# Altium PCB WGPIB.PcbDoc
Units mm, origin at the board's own origin, x right, y up, seen from the top; angles counter-clockwise.
Board outline 64 x 55 mm, 2 copper layers (Top Layer, Bottom Layer); 63 components, 75 nets, 321 pads, 118 vias.
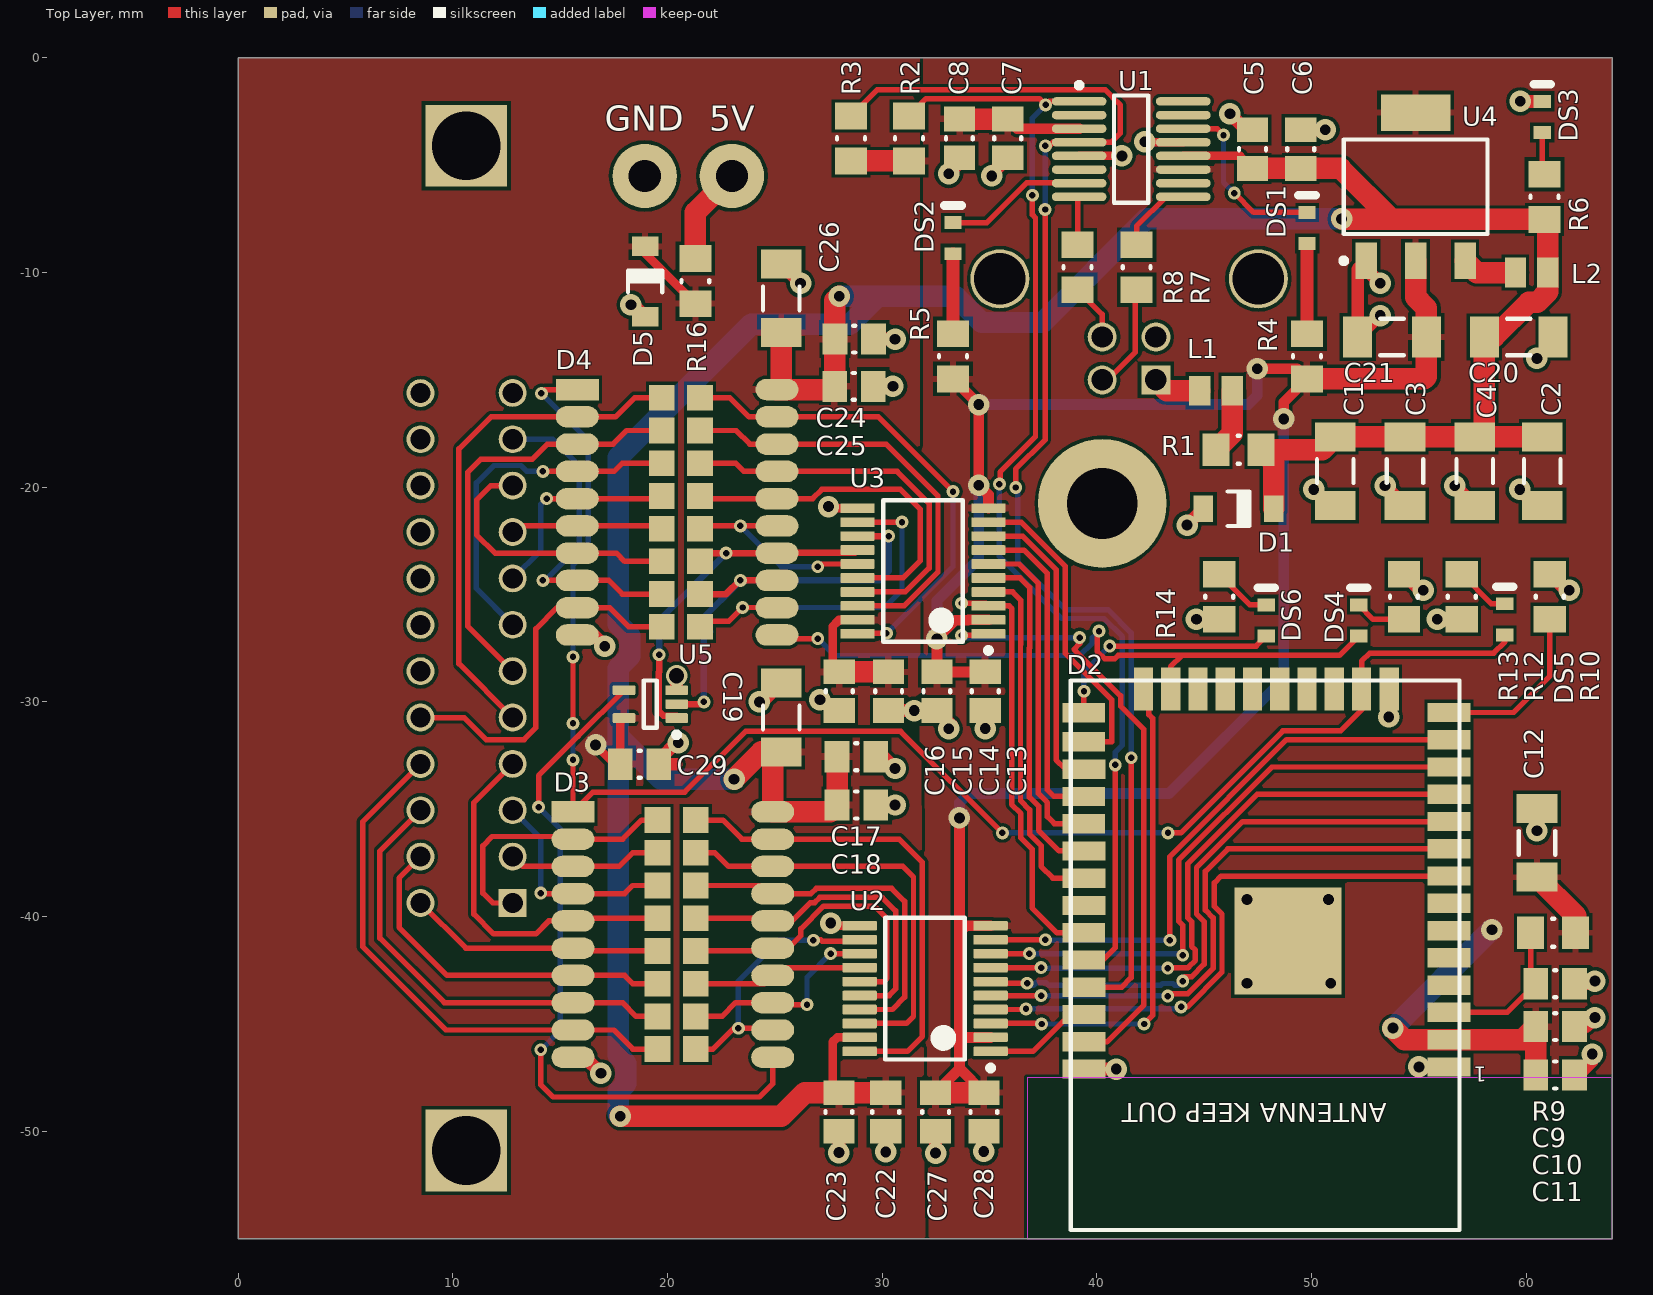
[diagram p0: Top Layer view]
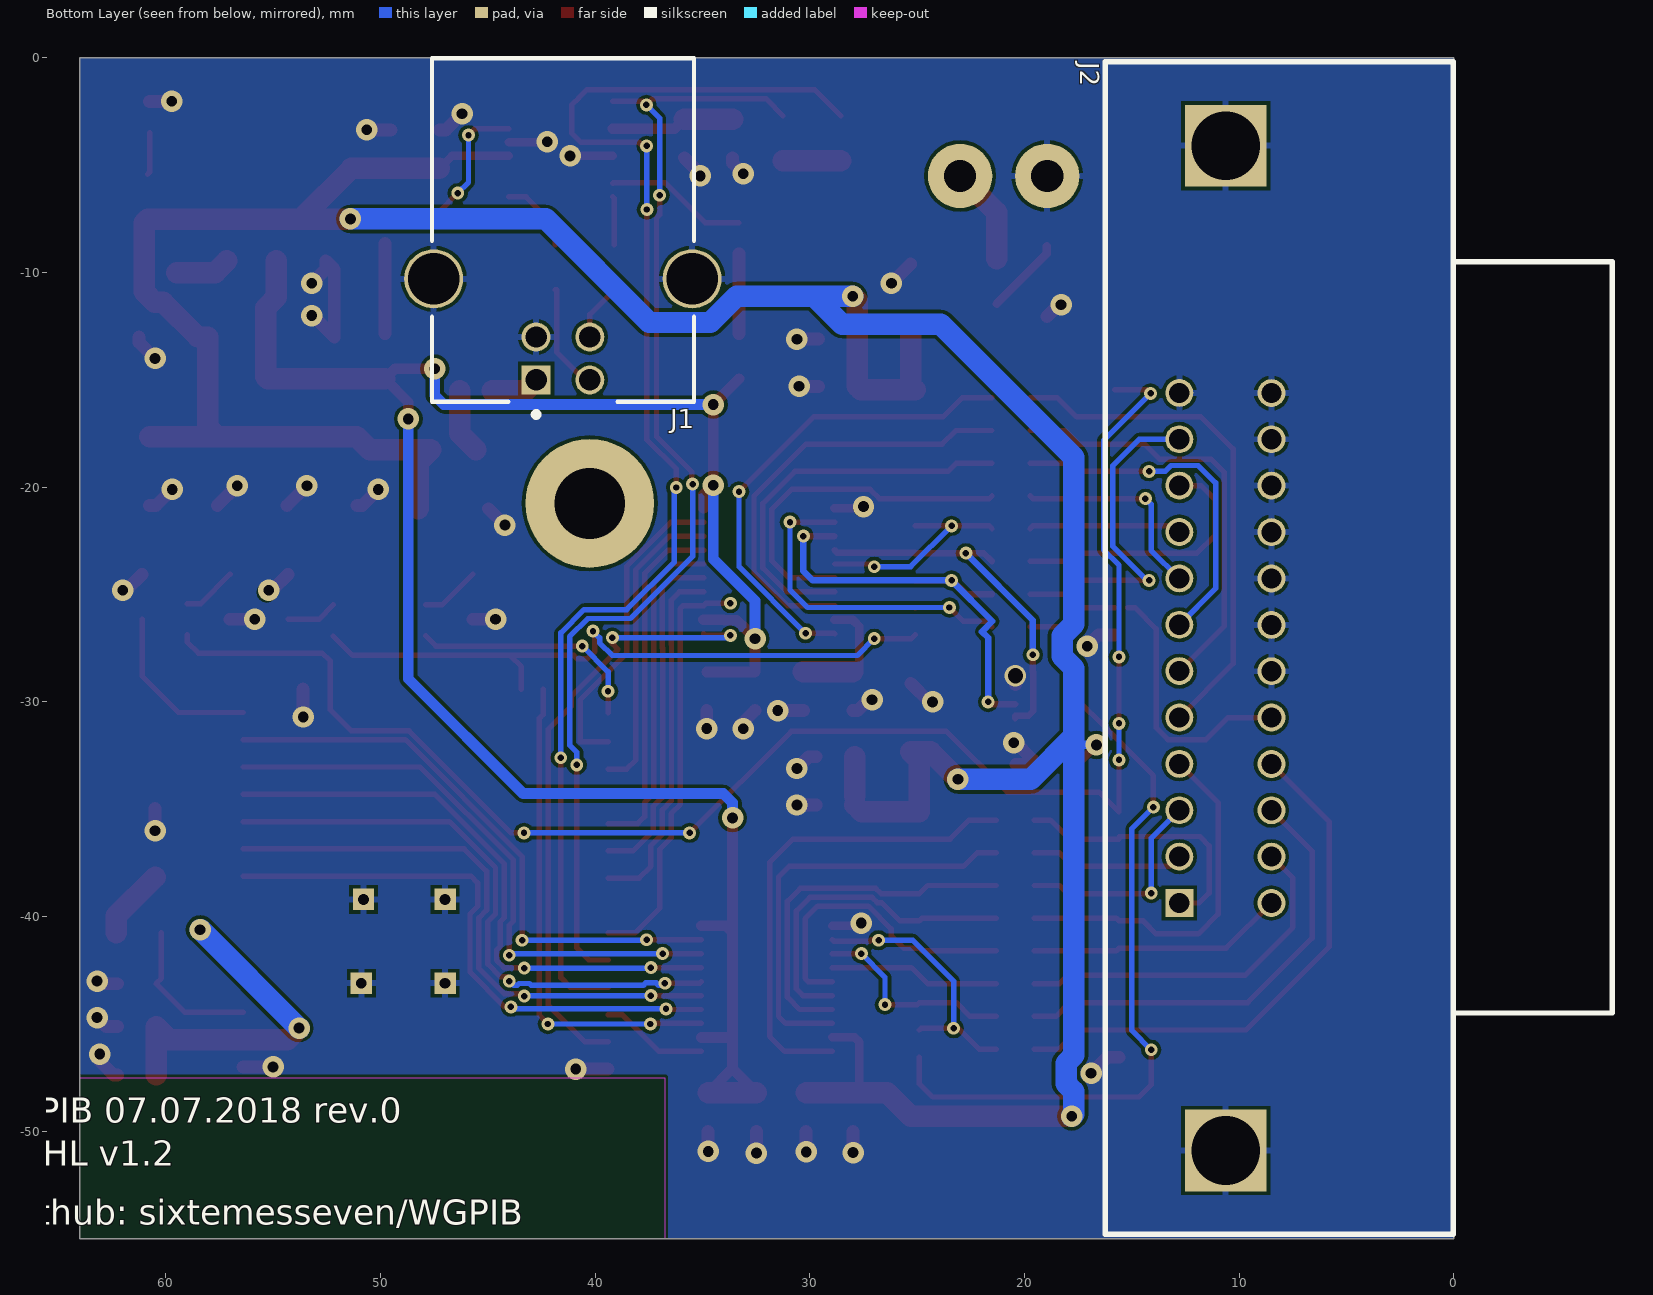
[diagram p1: Bottom Layer view, seen from below]

## Layer stack, top to bottom
Top Solder: solder mask 0.0102, Solder Resist, Dk 3.5
Top Layer: signal copper 0.0356
Dielectric 1: dielectric 0.32, FR-4, Dk 4.8
Bottom Layer: signal copper 0.0356
Bottom Solder: solder mask 0.0102, Solder Resist, Dk 3.5

## Board outline
64,0 64,-55 0,-55 0,0

## Design rules (kind name [scope] priority, off if disabled: settings)
Clearance [All] p1: gap=0.16 ignorepadtopadclearanceinfootprint=FALSE
PolygonConnect [All] p1: thpad.connectstyle=Relief thpad.reliefconductorwidth=0.3 thpad.reliefentries=4 thpad.polygonreliefangle="90 Angle" thpad.airgapwidth=0.16 smdpad.connectstyle=Relief smdpad.reliefconductorwidth=0.3 smdpad.reliefentries=4 smdpad.polygonreliefangle="90 Angle" smdpad.airgapwidth=0.16 via.connectstyle=Direct via.reliefconductorwidth=0.254 via.reliefentries=4 via.polygonreliefangle="90 Angle" via.airgapwidth=0.254
RoutingVias [All] p1: holewidth=0.3 width=0.6 viastyle="Through Hole" minholewidth=0.3 minwidth=0.6 maxholewidth=0.711 maxwidth=1.27
SolderMaskExpansion [All] p1: expansion=0.102
Width [All] p1: maxlimit=5 minlimit=0.254 preferedwidth=0.254
30 further rules are at their usual default settings.

## Classes and differential pairs
component class WGPIB: C9 C10 C11 C12 C13 C14 C15 C16 C17 C18 C19 C20 C21 C22 C23 C24 C25 C26 C27 C28 C29 D2 D3 D4 DS4 DS5 DS6 J2 L2 R9 R10 R12 R13 R14 U2 U3 U4 U5
component class D?: C1 C2 C3 C4 C5 C6 C7 C8 D1 D5 DS1 DS2 DS3 J1 L1 R1 R2 R3 R4 R5 R6 R7 R8 R16 U1

## Components (designator, comment, footprint, x,y, rotation, side; value= is the part's Value field where it differs from the comment)
C1 "22uF" CAPC1206(3216)190_M 51.1,-19.25 r90 top
C2 "22uF" CAPC1206(3216)190_M 60.75,-19.25 r90 top
C3 "22uF" CAPC1206(3216)190_M 54.35,-19.25 r90 top
C4 "22uF" CAPC1206(3216)190_M 57.6,-19.25 r90 top
C5 "100nF" CAPC0805(2012)145_N 47.25,-4.25 r270 top
C6 "1uF" CAPC0805(2012)145_N 49.5,-4.25 r270 top value=100nF
C7 "100nF" CAPC0805(2012)145_N 35.85,-3.75 r90 top
C8 "1uF" CAPC0805(2012)145_N 33.6,-3.75 r90 top value=100nF
C9 "100nF" CAPC0805(2012)145_N 61.35,-43.125 r180 top
C10 "100nF" CAPC0805(2012)145_N 61.35,-45.125 r180 top
C11 "1uF" CAPC0805(2012)145_N 61.35,-47.375 r180 top value=100nF
C12 "22uF" CAPC1206(3216)190_M 60.5,-36.564 r270 top
C13 "100nF" CAPC0805(2012)145_N 34.8,-29.5 r90 top
C14 "1uF" CAPC0805(2012)145_N 32.55,-29.5 r90 top value=100nF
C15 "100nF" CAPC0805(2012)145_N 30.3,-29.5 r90 top
C16 "1uF" CAPC0805(2012)145_N 28,-29.5 r90 top value=100nF
C17 "100nF" CAPC0805(2012)145_N 28.8,-32.55 r180 top
C18 "1uF" CAPC0805(2012)145_N 28.8,-34.8 r180 top value=100nF
C19 "22uF" CAPC1206(3216)190_M 25.3,-30.728 r270 top
C20 "22uF" CAPC1206(3216)190_M 59.65,-13 r180 top
C21 "22uF" CAPC1206(3216)190_M 53.75,-13 r0 top
C22 "100nF" CAPC0805(2012)145_N 30.17,-49.1 r90 top
C23 "1uF" CAPC0805(2012)145_N 27.987,-49.1 r90 top value=100nF
C24 "100nF" CAPC0805(2012)145_N 28.7,-13.1 r180 top
C25 "1uF" CAPC0805(2012)145_N 28.685,-15.3 r180 top value=100nF
C26 "22uF" CAPC1206(3216)190_M 25.3,-11.2 r270 top
C27 "100nF" CAPC0805(2012)145_N 32.487,-49.1 r90 top
C28 "1uF" CAPC0805(2012)145_N 34.737,-49.1 r90 top value=100nF
C29 "100nF" CAPC0805(2012)145_N 18.7,-32.9 r180 top
D1 "MMSD4148T3G" ONSC-SOD123-2-425G-04_V 46.6,-21 r180 top
D2 "ESP-WROOM-32" ESP-WROOM-32 39.39,-30.5 r180 top locked
D3 "SN75160BDWR" SOIC-20 15.6,-35.12 r0 top
D4 "SN75162BDWR" SOIC-20 15.8,-15.45 r0 top
D5 "MMSD4148T3G" ONSC-SOD123-2-425G-04_V 18.962,-10.415 r270 top
DS1 "TLMS1100-GS08" VISH-TLMX1100_V 49.79,-7.925 r90 top
DS2 "TLMS1100-GS08" VISH-TLMX1100_V 33.3,-8.4 r90 top
DS3 "TLMS1100-GS08" VISH-TLMX1100_V 60.75,-2.75 r90 top
DS4 "TLMS1100-GS08" VISH-TLMX1100_V 52.2,-26.204 r90 top
DS5 "TLMS1100-GS08" VISH-TLMX1100_V 59,-26.153 r90 top
DS6 "TLMS1100-GS08" VISH-TLMX1100_V 47.89,-26.2 r90 top
J1 "61729-0010BLF" FCI-61729-0010BLF-6_V 41.496,-8.01 r0 bottom locked
J2 "GPIB" "GPIB THT" 10.631,-27.489 r90 bottom locked
L1 "FBMJ2125HM210NT" INDC2013X105X50LL20T30 45.55,-15.501 r0 top
L2 "FBMJ2125HM210NT" INDC2013X105X50LL20T30 60.25,-10 r180 top
R1 "FUSE" RESC0805(2012)_M 46.6,-18.25 r0 top value="33.00 Ohm"
R2 "10k" RESC0805(2012)_M 31.25,-3.75 r270 top value="33.00 Ohm"
R3 "10k" RESC0805(2012)_M 28.55,-3.75 r270 top value="33.00 Ohm"
R4 "330" RESC0805(2012)_M 49.79,-13.9 r270 top value="33.00 Ohm"
R5 "330" RESC0805(2012)_M 33.3,-13.9 r270 top value="33.00 Ohm"
R6 "330" RESC0805(2012)_M 60.85,-6.472 r270 top value="33.00 Ohm"
R7 "33" RESC0805(2012)_M 41.85,-9.75 r90 top value="33.00 Ohm"
R8 "33" RESC0805(2012)_M 39.1,-9.75 r90 top value="33.00 Ohm"
R9 "10k" RESC0805(2012)_M 61.25,-40.75 r0 top value="33.00 Ohm"
R10 "10k" RESC0805(2012)_M 61.1,-25.1 r270 top value="33.00 Ohm"
R12 "330" RESC0805(2012)_M 57,-25.1 r90 top value="33.00 Ohm"
R13 "330" RESC0805(2012)_M 54.3,-25.1 r270 top value="33.00 Ohm"
R14 "330" RESC0805(2012)_M 45.7,-25.1 r90 top value="33.00 Ohm"
R16 "FUSE" RESC0805(2012)_M 21.3,-10.4 r270 top value="33.00 Ohm"
U1 "FT230XS-R" SSOP-16_M 41.6,-4.25 r0 top
U2 "TXS0108EPWR" PW0020A_M 32,-43.35 r180 top
U3 "TXS0108EPWR" PW0020A_M 31.9,-23.9 r180 top locked
U4 "LT1117CST-3.3" LT-ST-3-SOT-223_M 54.85,-6 r90 top
U5 "SN74LVC1G08DCKR" DCK0005A_M 19.2,-30.1 r180 top

## Footprints (in the part's own frame and the unit in brackets; to place one, negate y for a bottom-side part, rotate by r counter-clockwise, add the part's x,y. Pads: shape width x height; smd on the part's side, far side on the other; paste and mask are expansions set on the pad)
CAPC0805(2012)145_N [mm] "Chip Capacitor, Body 2.0x1.2mm, Height 1.45mm, IPC Medium Density"
  rect 1.15x1.45 smd: 1(-0.9,0) 2(0.9,0)
  silkscreen extent -0.05,-0.62 0.05,0.62, body extent -1.1,-0.72 1.1,0.73, height 1.45
CAPC1206(3216)190_M [mm] "Chip Capacitor, Body 3.2x1.6mm, Height 1.9mm, IPC Low Density"
  rect 1.35x1.9 smd: 1(-1.6,0) 2(1.6,0)
  silkscreen extent -0.55,-0.85 0.55,0.85, body extent -1.7,-0.9 1.7,0.9, height 1.9
DCK0005A_M [mm] "SOT23, 5-Leads, Body 2.15x1.4mm, Pitch 0.65mm, IPC Low Density"
  rrect22% 1.05x0.45 smd: 1(-1.225,0.65) 2(-1.225,0) 3(-1.225,-0.65) 4(1.225,-0.65) 5(1.225,0.65)
  silkscreen extent -1.35,-1.1 0.3,1.55, body extent -1.14,-1 1.14,1, height 0.94
ESP-WROOM-32 [mm] "OEM_Module"
  rect 2x0.9 smd: 1(-17.01,16.5) 2(-17.01,15.23) 3(-17.01,13.96) 4(-17.01,12.69) 5(-17.01,11.42) 6(-17.01,10.15) 7(-17.01,8.88) 8(-17.01,7.61) 9(-17.01,6.34) 10(-17.01,5.07) 11(-17.01,3.8) 12(-17.01,2.53) 13(-17.01,1.26) 14(-17.01,-0.01) 25(0,0) 26(0,1.36) 27(-0.005,2.63) 28(0,3.9) 29(0,5.17) 30(-0.005,6.44) 31(-0.005,7.71) 32(-0.005,8.98) 33(0,10.25) 34(0,11.52) 35(-0.005,12.79) 36(-0.005,14.06) 37(-0.005,15.33) 38(-0.005,16.6)
  rect 0.9x2 smd: 15(-14.225,-1.1) 16(-12.94,-1.1) 17(-11.67,-1.1) 18(-10.4,-1.1) 19(-9.13,-1.1) 20(-7.86,-1.1) 21(-6.59,-1.1) 22(-5.32,-1.1) 23(-4.05,-1.1) 24(-2.78,-1.1)
  rect 1x1 hole 0.5: PAD(-11.5,12.6) PAD(-11.4,8.7) PAD(-7.6,8.7) PAD(-7.6,12.6)
  rect 5x5 smd mask-2: PAD(-9.512,10.631)
  silkscreen extent -17.5,-1.5 0.6,24.1, body extent -17.51,-1.44 0.56,24.1, height 5
FCI-61729-0010BLF-6_V [mm] "Through Hole, 6-Leads, Body 12.2x16mm"
  rect 1.35x1.35 hole 1: 1(1.254,6.99)
  round 1.35 hole 1: 2(-1.246,6.99) 3(-1.246,4.99) 4(1.254,4.99)
  round 2.75 hole 2.4: MH1(-6.016,2.28) MH2(6.024,2.28)
  silkscreen extent -6.1,-8 6.1,8.72, body extent -7.17,-8 7.17,8, height 11.14
"GPIB THT" [mm] "DXP://VaultExplorer:Navigate_URL?Plugin=Search&VaultGUID=B7D15EC3-160A-466F-A46C-7801FE6295A7&SavedSearchGUID=&GenericFilter=DXP://VaultExplorer:Navigate_URL?VaultGUID=B7D15EC3-160A-466F-A46C-7801FE6295A7&Plugin=Folders&FolderPath=112-024-113r001&Nav_ForceRefresh:=True&UserDefinedBrowseItemsOption_0:=0&UserDefinedBrowseItemsOption_1:=-1&UserDefinedBrows112-024-113r001"
  rect 1.3x1.3 hole 0.94: 1(-11.875,2.159)
  round 1.3 hole 0.94: 2(-9.715,2.159) 3(-7.555,2.159) 4(-5.395,2.159) 5(-3.235,2.159) 6(-1.075,2.159) 7(1.085,2.159) 8(3.245,2.159) 9(5.405,2.159) 10(7.565,2.159) 11(9.725,2.159) 12(11.885,2.159) 13(-11.875,-2.131) 14(-9.716,-2.131) 15(-7.557,-2.131) 16(-5.398,-2.131) 17(-3.239,-2.131) 18(-1.08,-2.131) 19(1.079,-2.131) 20(3.238,-2.131) 21(5.397,-2.131) 22(7.565,-2.131) 23(9.725,-2.131) 24(11.874,-2.131)
  rect 3.81x3.81 hole 3.2: PAD(-23.4,0) PAD(23.4,0)
  silkscreen extent -27.3,-18 27.3,5.6
INDC2013X105X50LL20T30 [mm] "Chip Inductor, 2-Leads, Body 2.2x1.45mm, IPC High Density"
  rect 0.99x1.39 smd: 1(-0.755,0) 2(0.755,0)
  body extent -1.1,-0.72 1.1,0.72, height 1.05
LT-ST-3-SOT-223_M [mm] "SOT223, 4-Leads, Body 6.505x3.505mm, Pitch 2.3mm, IPC Low Density"
  rect 1.7x1 smd: 1(-3.45,2.3) 2(-3.45,0) 3(-3.45,-2.3)
  rect 1.7x3.25 smd: 4(3.45,0)
  silkscreen extent -3.57,-3.35 2.2,3.47, body extent -1.86,-3.35 1.86,3.35, height 1.8
ONSC-SOD123-2-425G-04_V [mm] "SOD123, 2-Leads, Body 2.69x1.6mm, Height 1.35mm"
  rect 0.915x1.22 smd: 1(-1.637,0) 2(1.637,0)
  silkscreen extent -0.5,-0.8 0.5,0.8, body extent -1.35,-0.8 1.35,0.8, height 1.35
PW0020A_M [mm] "SOP, 20-Leads, Body 6.6x4.5mm, Pitch 0.65mm, IPC Low Density"
  rrect22% 1.6x0.45 smd: 1(-3.05,2.925) 2(-3.05,2.275) 3(-3.05,1.625) 4(-3.05,0.975) 5(-3.05,0.325) 6(-3.05,-0.325) 7(-3.05,-0.975) 8(-3.05,-1.625) 9(-3.05,-2.275) 10(-3.05,-2.925) 11(3.05,-2.925) 12(3.05,-2.275) 13(3.05,-1.625) 14(3.05,-0.975) 15(3.05,-0.325) 16(3.05,0.325) 17(3.05,0.975) 18(3.05,1.625) 19(3.05,2.275) 20(3.05,2.925)
  silkscreen extent -3.18,-3.3 1.85,3.82, body extent -3.21,-3.25 3.21,3.25, height 1
RESC0805(2012)_M [mm] "Chip Resistor, Body 2.0x1.3mm, IPC Low Density"
  rect 1.25x1.5 smd: 1(-1.05,0) 2(1.05,0)
  silkscreen extent -0.05,-0.65 0.05,0.65, body extent -1.1,-0.67 1.1,0.67, height 0.7
SOIC-20 [mm]
  rect 2x1 smd: 1(0,0)
  oval 2x1 smd: 2(0,-1.27) 3(0,-2.54) 4(0,-3.81) 5(0,-5.08) 6(0,-6.35) 7(0,-7.62) 8(0,-8.89) 9(0,-10.16) 10(0,-11.43) 11(9.3,-11.43) 12(9.3,-10.16) 13(9.3,-8.89) 14(9.3,-7.62) 15(9.3,-6.35) 16(9.3,-5.08) 17(9.3,-3.81) 18(9.3,-2.54) 19(9.3,-1.27) 20(9.3,0)
  rect 1.2x1.2 smd: 2(3.937,-0.381) 3(3.937,-1.905) 4(3.937,-3.429) 5(3.937,-4.953) 6(3.937,-6.477) 7(3.937,-8.001) 8(3.937,-9.525) 9(3.937,-11.049) 12(5.715,-11.049) 13(5.715,-9.525) 14(5.715,-8.001) 15(5.715,-6.477) 16(5.715,-4.953) 17(5.715,-3.429) 18(5.715,-1.905) 19(5.715,-0.381)
SSOP-16_M [mm] "SOP, 16-Leads, Body 4.9x3.9mm, Pitch 0.635mm, IPC Low Density"
  oval 2.55x0.4 smd: 1(-2.425,2.223) 2(-2.425,1.588) 3(-2.425,0.953) 4(-2.425,0.318) 5(-2.425,-0.317) 6(-2.425,-0.952) 7(-2.425,-1.587) 8(-2.425,-2.222) 9(2.425,-2.222) 10(2.425,-1.587) 11(2.425,-0.952) 12(2.425,-0.317) 13(2.425,0.318) 14(2.425,0.953) 15(2.425,1.588) 16(2.425,2.223)
  silkscreen extent -2.55,-2.5 0.8,3.1, body extent -1.99,-2.5 1.99,2.5, height 1.76
VISH-TLMX1100_V [mm] "SMD, 2-Leads, Body 1.6x0.8mm"
  rect 0.6x0.8 smd: 1(-0.725,0) 2(0.725,0)
  silkscreen extent 1.53,-0.4 1.53,0.4, body extent -0.8,-0.4 0.8,0.4, height 0.65

## Part data
C1 C2 C3 C4 C12 C19 C20 C21 C26: library part CMP-1037-04993-1, Case-EIA=1206, Case-Metric=3216, Rated Voltage="16 V", Tolerance=±20%, Max Thickness="1.9 mm", Technology=SMT
C5 C6 C7 C8 C9 C10 C11 C13 C14 C15 C16 C17 C18 C22 C23 C24 C25 C27 C28 C29: library part CMP-1036-04431-1, Case-EIA=0805, Case-Metric=2012, Rated Voltage="100 V", Tolerance=±20%, Max Thickness="1.45 mm", Technology=SMT
D1 D5: library part CMP-0895-00002-1, Manufacturer="ON Semiconductor", Temperature Range="-55 to 150 degC", CD (Max)="4 pF", ComponentLink1Description="Manufacturer URL", ComponentLink1URL=http://www.onsemi.com/, ComponentLink2Description=Datasheet, ComponentLink2URL=http://www.onsemi.com/pub_link/Collateral/MMSD4148T1-D.PDF, ComponentLink3Description="Package Specification", ComponentLink3URL=http://www.onsemi.com/pub_link/Collateral/425-04.PDF, DatasheetVersion="Rev. 11", IR @ VR="75 V (Max)=50 uA", Mounting Technology="Surface Mount", PackageDescription="2-Pin SOD123, Body 2.69 x 1.6 mm, Height 1.35 mm", PackageReference=SOD123-2-425G-04, PackageVersion="Rev. 04G", Packing="Tape and Reel", PartNumber=MMSD4148T3G, PD (Max)="425 mW", RoHS=TRUE, Trr (Max)="4 ns", VBR (Min)="100 V", VF (Max)="1 A"
D2: "ESP32 Module"
D4: library part SN75161BDWR
DS1 DS2 DS3 DS4 DS5 DS6: library part CMP-1666-00027-1, "LED, RED, 2.1 V, -40 to 100 degC, 2-Pin SMD (0603), RoHS, Tape and Reel", Capacitance="12 pF", Case/Package=0603, Case Code (Metric)=1608, Max Operating Temperature=125degC, Min Operating Temperature=-55degC, Package Quantity=4000, Resistance="100000000000 Ohm", Tolerance=5%, Type (Capacitors)=C0G, Voltage Rating="50 V", Case Code (Imperial)=0603, ComponentLink1Description="Manufacturer URL", ComponentLink1URL=http://www.vishay.com/, ComponentLink2Description=Datasheet, ComponentLink2URL=http://www.vishay.com/docs/83173/tlmb1100.pdf, DatasheetVersion="Rev. 2.7, 03/2016", Height="0.8 mm", Length="1.6 mm", Mount="Surface Mount", PackageDescription="2-Pin Surface Mount Device, Body 1.6 x 0.8 mm", PackageReference=TLMX1100, Packaging="Tape and Reel", Pins=2, Radiation Hardening=No, REACH SVHC="No SVHC", RoHSCompliant=True, Voltage Rating (DC)="50 V", Width="0.8 mm"
J1: library part CMP-0397-00002-2, "Single USB 2.0, B Type, Right Angle Jack, Through Hole, RoHS, Tube", Manufacturer="FCI Electronics", ComponentLink1Description="Manufacturer URL", ComponentLink1URL=http://portal.fciconnect.com/, ComponentLink2Description=Datasheet, ComponentLink2URL=http://portal.fciconnect.com/Comergent//fci/drawing/61729.pdf, ComponentLink3Description="Package Specification", ComponentLink3URL=http://portal.fciconnect.com/Comergent//fci/drawing/61729.pdf, Connector Type=USB-B, DatasheetVersion="Rev. V", Gender=Receptacle, Mounting Technology="Through Hole", Number of Contacts=4, PackageDescription="6-Pin, Through Hole, Body 12.2 x 16 mm", PackageReference=61729-0010BLF, Packing=Tube, PartNumber=61729-0010BLF, RoHS=TRUE, Specifications="USB 2.0"
J2: "112-024-113R001"
L1 L2: library part CMP-1660-00003-1, "Chip Inductor, 21 Ohm, +/- 30%, 6 A, -40 to 125 degC, 0805 (2012 Metric), RoHS, Tape and Reel", Case\Package=0805, Case Code (Metric)=2012, Current Rating="6 A", Max Operating Temperature="125 degC", Min Operating Temperature="-40 degC", Package Quantity=1, Resistance="4 mohm", Tolerance=30%, Case Code (Imperial)=0805, ComponentLink1Description="Manufacturer URL", ComponentLink1URL=http://www.t-yuden.com/, ComponentLink2Description=Datasheet, ComponentLink2URL=http://ds.yuden.co.jp/TYCOMPAS/ut/detail.do?productNo=FBMJ2125HM210NT&fileName=FBMJ2125HM210NT_SS&mode=specSheetDownload, Core Material=Ferrite, DatasheetVersion=08/2016, Height="0.85 mm", Impedance="21 Ohm", Length="2 mm", Max Current Rating="6 A", Mount="Surface Mount", Mounting Technology="Surface Mount", PackageDescription="2-Pin Surface Mount Device, Body 2 x 1.25 mm", PackageReference=0805, Packaging="Tape and Reel", REACH SVHC=Unknown, RoHSCompliant=true, Width="1.25 mm"
R1 R2 R3 R4 R5 R6 R7 R8 R9 R10 R12 R13 R14 R16: library part CMP-1013-00038-1, Case-EIA=0805, Case-Metric=2012, Power="0.125 W", Tolerance="5 %", Technology=SMT
U1: library part CMP-0248-00026-2, "USB to Basic UART Interface Chip, UHCI/OHCI/EHCI Compatible, USB 2.0 Compatible, -40 to +85 degC, 16-Pin SSOP, Pb-Free, Tape and Reel", Manufacturer=FTDI, Code_JEDEC=MO-137-AB, ComponentLink1Description="Manufacturer URL", ComponentLink1URL=http://www.ftdichip.com/, ComponentLink2Description=Datasheet, ComponentLink2URL=http://www.ftdichip.com/Support/Documents/DataSheets/ICs/DS_FT230X.pdf, ComponentLink3Description="FT230X Product Page", ComponentLink3URL=www.ftdichip.com/Products/ICs/FT230X.html, DatasheetVersion="ver 1.2, Feb-2013", PackageDescription="16-Pin Small Outline Package, 8.6 x 3.9 mm Body, 0.635 mm Pitch", PackageReference=SSOP-16, PackageVersion=Feb-13, PartNumber=FT230XS-R, RevisionNote="DatasheetVersion updated to 1.2 Feb-2013"
U2 U3: library part CMP-2000-04956-1, "Bidirectional Voltage-Level Translator for Open-Drain and Push-Pull Application, 8 bit, 1.2 to 3.6 V, -40 to 85 degC, 20-Pin TSSOP, Green (RoHS & no Sb/Br), Tape and Reel", Logic Case Style=TSSOP, Manufacturer="Texas Instruments", Operating Temperature Max=85degC, Operating Temperature Min=-40degC, Output Current=620µA, Supply Voltage Max=5.5V, Supply Voltage Min=1.2V, Datasheet URL=https://datasheet.ciiva.com/14287/txs0108e-14287280.pdf, Datasheet Version="Rev. B, 09/2008", Logic Type=VoltageLevelTranslator, Manufacturer URL=http://www.ti.com/, MSL=MSL1-Unlimited, No. of Inputs=8, No. of Pins=20, Packaging=CutTape, Propagation Delay=4.8ns, SVHC=NoSVHC(16-Jun-2014)
U4: library part CMP-0476-01817-1, "0.8 A Low Dropout Positive Regulator, 2.45 to 15 V Vin, 3.3 V Vout, 3-pin SOT223 (ST-3), 0 to 125 degC", Dropout Voltage(V)=1.1, Manufacturer="Linear Technology", Output Voltage="3.3 V", ComponentLink1Description="Manufacturer URL", ComponentLink1URL=http://www.linear.com/, ComponentLink2Description=Datasheet, ComponentLink2URL=http://cds.linear.com/docs/en/datasheet/1117fd.pdf, ComponentLink3Description="Package Specification", ComponentLink3URL=http://cds.linear.com/docs/en/packaging/SOT_3_05-08-1630.pdf, DatasheetVersion="Rev. D", Discrete Pass Element=no, Iout(mA)=800, Isupply(mA)=5, Mounting Technology="Surface Mount", Number of Outputs=1, PackageDescription="3-Pin Plastic SOT-223, 3.505 x 6.505 mm Body, Pitch 2.3 mm", PackageReference=ST-3, PackageVersion=Jun-10, PartNumber=LT1117CST-3.3, PSRR(dB)=75, RoHS=FALSE, Vin Max(V)=15, Vin Min(V)=2.45
U5: library part CMP-0859-00266-3, "Single 2-Input Positive-AND Gate, DCK0005A, LARGE T&R", F @ Nom Voltage(Max)(Mhz)=150, Generic Part Number=SN74LVC1G08, ICC @ Nom Voltage(Max)(mA)=0.01, Manufacturer="Texas Instruments", Operating Temperature Range(C)="-40 to 125,-40 to 85", Rating=Catalog, tpd @ Nom Voltage(Max)(ns)=4.5,6,4,5, Voltage(Nom)(V)=1.8,2.5,3.3,5, 3-State Output=No, Bits(#)=1, DatasheetVersion=SCES217Y, Gate Type=AND, Input Type=CMOS/TTL, Logic=True, Output Drive (IOL/IOH)(Max)(mA)=32/-32, Output Type=CMOS, PackageReference=DCK0005A, PartId=1, Schmitt Trigger=No, Sub-Family="AND Gate", Technology Family=LVC, VCC(Max)(V)=5.5, VCC(Min)(V)=1.65

## Free pads (board coordinates)
  round 6 hole 3.3: 41(40.25,-20.75)
  round 3 hole 1.5: 42(23,-5.5) 43(18.943,-5.5)

## Via types
v1: diameter 1, hole 0.5, Top Layer to Bottom Layer, tented both sides, 59 vias
v2: diameter 0.6, hole 0.3, Top Layer to Bottom Layer, tented both sides, 58 vias
v3: diameter 1, hole 0.711, Top Layer to Bottom Layer, tented both sides, 1 vias

## Nets (pads, with @x,y where several pads share a name; then routed paths per layer and width w, separated by ;. In a path a pad name is that pad's centre, name@x,y a point inside that pad or via, vN(x,y) a via of type N, cw(c..) or ccw(c..) an arc to the next point about the centre after c; other vN are vias at no path point)
3.3V: C7.2 C8.2 C10.2 C11.2 C12.2 C13.2 C14.2 C21.2 C27.2 C28.2 D2.2 R2.2 R3.2 R4.2 R5.2 R9.2 U1.3 U1.11 U2.2 U2.10 U3.2 U3.10 U4.2 U4.4 | length 129.5
  Top Layer w0.5: C27.2 33.6,-47.088 ; R5.2 v1(34.5,-16.15) v1(34.5,-19.9) 34.95,-20.35 U3.10 ; v1(33.6,-35.4) 33.6,-40.725 ; C28.2 33.625,-47.088 33.6,-47.088 ; C13.2 C14.2 v1(32.55,-27.05) 32.99,-26.61 32.99,-26.606 33.406,-26.19 33.994,-26.19 34.002,-26.198 34.024,-26.175 U3.2 ; U2.2 33.775,-45.625 33.6,-45.8 ; U2.10 33.9,-40.425 33.6,-40.725 ; C7.2@36.074,-3.074 36.298,-3.297 U1.3 ; v1(47.471,-14.482) 49.322,-14.482 R4.2 48.7,-16.04 v1(48.7,-16.818) ; 33.6,-47.088 33.6,-45.8 ; 33.6,-45.8 33.6,-40.725
  Top Layer w1: R3.2 R2.2 ; C27.2 C28.2 ; C8.2 C7.2 ; R4.2 55.25,-14.95 55.35,-14.85 C21.2 55.35,-11.65 54.85,-11.15 U4.2 ; v1(53.792,-45.192) 54.33,-45.73 D2.2 59.845,-45.73 C10.2 C11.2 ; C12.2 62.3,-39.964 R9.2
  Bottom Layer w0.5: v1(32.55,-27.05) 32.55,-25.29 34.5,-23.34 v1(34.5,-19.9) ; v1(33.6,-35.4) 33.6,-34.7 34.033,-34.267 43.358,-34.267 48.7,-28.925 v1(48.7,-16.818) ; v1(34.5,-16.15) 47.05,-16.15 47.471,-15.729 v1(47.471,-14.482)
  Bottom Layer w1: v1(53.792,-45.192) 58.377,-40.606 v1(58.4,-40.606)
5V: C1.2 C2.2 C3.2 C4.2 C5.2 C6.2 C15.2 C16.2 C17.2 C18.2 C19.2 C20.2 C22.2 C23.2 C24.2 C25.2 C26.2 C29.2 D1.1 D3.20 D4.20 D5.1 L2.1 R1.2 R6.2 R16.2 U1.12 U2.19 U3.19 U5.5 | length 179.9
  Top Layer w0.4: v1(16.65,-32) 17.55,-32.9 C29.2 17.8,-30.925 U5.5 ; D5.1 18.962,-9.112 R16.2 ; C25.2@27.667,-15.183 C25.2@27.75,-15.1 ; C18.2 C18.2@27.9,-34.4 ; C23.2 27.7,-47.913 27.7,-45.83 27.905,-45.625 U2.19 ; C16.2 27.975,-28.575 27.69,-28.575 27.69,-26.48 27.93,-26.24 27.975,-26.24 27.975,-26.175 U3.19 ; U1.12 46.667,-4.567 C5.2
  Top Layer w1: v1(17.8,-49.3) 25.3,-49.3 26.4,-48.2 C23.2 C22.2 ; v1(23.1,-33.6) 24.372,-32.328 C19.2 24.9,-32.728 D3.20 27.58,-35.12 C18.2 ; C26.2 25.3,-15.25 D4.20 27.635,-15.45 C25.2 27.8,-15.285 C24.2 27.8,-11.3 v1(28,-11.1) ; C18.2@27.9,-34.4 C17.2 ; C16.2 C15.2 ; C5.2 C6.2 51.35,-5.15 53.723,-7.523 ; D1.1 48.237,-18.838 R1.2 50.5,-18.25 C1.2 C3.2 C4.2 ; v1(51.4,-7.5) 51.423,-7.523 53.723,-7.523 ; C2.2 C4.2 ; 53.723,-7.523 R6.2 61.005,-7.678 L2.1 61.005,-10.895 60.51,-11.39 60.11,-11.39 58.5,-13 C20.2 58.05,-17.2 C4.2
  Bottom Layer w0.4: v1(16.65,-32) 17.298,-32 17.7,-31.598
  Bottom Layer w1: v1(17.8,-49.3) 17.7,-49.2 17.7,-48.14 18.06,-47.78 18.06,-46.82 17.7,-46.46 17.7,-31.598 ; v1(23.1,-33.6) 19.702,-33.6 17.7,-31.598 ; v1(28,-11.1) 29.8,-11.1 ; v1(51.4,-7.5) 42.3,-7.5 37.475,-12.325 34.637,-12.325 33.412,-11.1 29.8,-11.1 ; 17.7,-31.598 17.7,-28.422 18.242,-27.88 18.242,-26.92 17.7,-26.378 17.7,-18.6 23.9,-12.4 28.5,-12.4 29.8,-11.1
5V_External: pad.42 R16.1 | length 4.6
  Top Layer w1: R16.1 21.3,-7.2 pad.42
ATN: D2.27 U3.8 | length 14.1
  Top Layer w0.254: U3.8 36.541,-22.275 38.107,-23.841 38.107,-27.997 38.1,-28.004 38.1,-32.7 38.53,-33.13 D2.27
DAV: D2.29 U3.6 | length 15.6
  Top Layer w0.254: U3.6 36.375,-23.575 37.279,-24.479 37.279,-27.654 37.272,-27.661 37.272,-34.257 37.7,-34.685 37.7,-35.346 38.024,-35.67 D2.29
DC: D2.23 D4.11 DS4.1 | length 31.5
  Top Layer w0.254: D4.11 25.27,-27.05 v2(27,-27.05) ; v2(40.1,-26.7) 40.013,-26.787 40.013,-27.643 40.357,-27.987 40.843,-27.987 41.004,-27.826 43.971,-27.826 ; D2.23 43.44,-28.357 43.971,-27.826 ; DS4.1 51.303,-27.826 43.971,-27.826
  Bottom Layer w0.254: v2(27,-27.05) 27.787,-27.837 39.193,-27.837 39.787,-27.243 39.787,-27.013 v2(40.1,-26.7)
DIO1: D2.36 U2.1 | length 5.1
  Top Layer w0.254: U2.1 37.025,-46.275 38.74,-44.56 D2.36
DIO2: D2.24 U2.3 | length 23
  Top Layer w0.254: U2.3 37.4,-44.975 v2(37.425,-45) ; v2(42.2,-45) 42.601,-44.599 42.601,-30.768 42.427,-30.594 D2.24@42.427,-29.4
  Bottom Layer w0.254: v2(37.425,-45) v2(42.2,-45)
DIO3: D2.8 U2.4 | length 26.9
  Top Layer w0.254: U2.4 36.675,-44.325 v2(36.7,-44.3) ; v2(43.925,-44.2) 44.215,-44.2 45.829,-42.586 45.829,-39.887 45.47,-39.528 45.47,-38.43 45.79,-38.11 D2.8
  Bottom Layer w0.254: v2(36.7,-44.3) 43.825,-44.3 v2(43.925,-44.2)
DIO4: D2.9 U2.5 | length 27.4
  Top Layer w0.254: U2.5 35.062,-43.687 36.993,-43.687 37.005,-43.675 v2(37.4,-43.675) ; v2(43.3,-43.7) 43.413,-43.587 44.243,-43.587 45.415,-42.415 45.415,-40.059 45.056,-39.7 45.056,-37.886 46.102,-36.84 D2.9
  Bottom Layer w0.254: v2(37.4,-43.675) 43.275,-43.675 v2(43.3,-43.7)
DIO5: D2.10 U2.6 | length 28
  Top Layer w0.254: U2.6 35.125,-43.1 v2(36.75,-43.1) ; v2(44,-43) 44,-42.9 44.099,-42.801 44.415,-42.801 45.001,-42.215 45.001,-40.23 44.642,-39.871 44.642,-37.714 46.786,-35.57 D2.10
  Bottom Layer w0.254: v2(36.75,-43.1) 36.85,-43.2 37.045,-43.2 37.157,-43.088 37.643,-43.088 37.755,-43.2 42.97,-43.2 43.057,-43.113 43.543,-43.113 43.63,-43.2 43.8,-43.2 v2(44,-43)
DIO6: D2.11 U2.7 | length 27.9
  Top Layer w0.254: U2.7 v2(37.4,-42.375) ; v2(43.3,-42.4) 43.313,-42.387 44.243,-42.387 44.28,-42.35 44.587,-42.043 44.587,-41.557 44.414,-41.384 44.414,-40.229 44.228,-40.043 44.228,-37.543 47.471,-34.3 D2.11
  Bottom Layer w0.254: v2(37.4,-42.375) 37.425,-42.4 v2(43.3,-42.4)
DIO7: D2.12 U2.8 | length 27.9
  Top Layer w0.254: U2.8 v2(36.858,-41.725) ; v2(44,-41.8) 44,-40.4 43.814,-40.214 43.814,-37.371 48.155,-33.03 D2.12
  Bottom Layer w0.254: v2(36.858,-41.725) 43.925,-41.725 v2(44,-41.8)
DIO8: D2.13 U2.9 | length 27.5
  Top Layer w0.254: U2.9 v2(37.6,-41.075) ; v2(43.4,-41.1) 43.4,-37.2 48.84,-31.76 D2.13
  Bottom Layer w0.254: v2(37.6,-41.075) 37.625,-41.1 v2(43.4,-41.1)
EN: C9.2 D2.3 R9.1 | length 7.1
  Top Layer w0.254: D2.3 59.115,-44.46 C9.2 60.2,-42.875 R9.1
EOI: D2.28 U3.7 | length 15.1
  Top Layer w0.254: U3.7 36.606,-22.925 37.693,-24.013 37.693,-27.826 37.686,-27.833 37.686,-34.086 38,-34.4 D2.28
GND: C1.1 C2.1 C3.1 C4.1 C5.1 C6.1 C7.1 C8.1 C9.1 C10.1 C11.1 C12.1 C13.1 C14.1 C15.1 C16.1 C17.1 C18.1 C19.1 C20.1 C21.1 C22.1 C23.1 C24.1 C25.1 C26.1 C27.1 C28.1 C29.1 D1.2 D2.1 D2.15 D2.38 D2.PAD D3.10 D4.10 D5.2 DS3.2 J1.4 J1.MH1 J1.MH2 J2.12 J2.18 J2.19 J2.20 J2.21 J2.22 J2.23 J2.24 J2.PAD pad.43 R10.1 R12.1 R13.1 R14.1 U1.5 U1.13 U2.11 U3.11 U4.1 U5.3 | length 61.9
  Top Layer w0.4: v1(27.5,-20.9) 27.575,-20.975 U3.11 ; v1(27.6,-40.3) 27.6,-40.425 U2.11 ; U1.5 v1(41.167,-4.567) ; v1(42.235,-3.9) 42.202,-3.932 U1.13
  Top Layer w0.6: D3.10 16.15,-46.55 v1(16.9,-47.3) ; D4.10 16.562,-26.88 v1(17.082,-27.4) ; v1(18.3,-11.5) 18.41,-11.5 D5.2 ; 20.4,-32.9 C29.1 19.6,-32.7 20.5,-31.8 v1(20.5,-31.9) ; v3@20.425,-29.193 v3(20.425,-28.78) ; v1(24.286,-30) 24.428,-30 C19.1 ; C26.1 v1(26.2,-10.5) ; v1(27.1,-29.9) 27.27,-29.9 27.77,-30.4 C16.1 ; v1(27.987,-50.987) C23.1 ; C25.1 v1(30.5,-15.3) ; C24.1 v1(30.6,-13.1) ; C18.1 v1(30.6,-34.8) ; C17.1 30.05,-32.55 v1(30.6,-33.1) ; v1(30.17,-50.958) C22.1 ; C15.1 v1(31.5,-30.4) ; v1(32.488,-51.012) C27.1 ; C14.1 33.25,-31.1 v1(33.1,-31.25) ; v1(33.1,-5.4) 33.6,-4.9 C8.1 ; v1(34.737,-50.937) C28.1 ; v1(34.8,-31.237) C13.1 ; v1(35.1,-5.5) 35.1,-5.4 C7.1 ; D2.38 v1(40.9,-47.1) ; v1(44.2,-21.763) D1.2 ; v1(44.637,-26.15) R14.1 ; v1(46.2,-2.6) 46.95,-3.35 C5.1 ; C6.1 v1(50.64,-3.35) ; v1(50.1,-20.1) 50.85,-20.85 C1.1 ; v1(53.2,-12) 53.15,-12 C21.1 52.15,-9.85 U4.1 52.55,-9.85 v1(53.2,-10.5) ; v1(53.424,-19.924) C3.1 ; v1(53.6,-30.7) 53.615,-30.685 D2.15 ; R13.1 55.05,-24.8 v1(55.2,-24.8) ; v1(55,-47) D2.1 ; v1(55.85,-26.15) R12.1 ; v1(56.674,-19.924) C4.1 ; v1(59.7,-20.1) 60.45,-20.85 C2.1 ; v1(59.725,-2.025) DS3.2 ; v1(60.5,-36) C12.1 ; v1(60.5,-14) 61.25,-13.25 C20.1 ; R10.1 61.85,-24.8 v1(62,-24.8) ; C11.1 62.425,-47.375 63.075,-46.725 v1(63.075,-46.4) ; C10.1 62.775,-45.125 v1(63.2,-44.7) ; C9.1 63.075,-43.125 v1(63.2,-43)
  Bottom Layer w0.4: v1(27.5,-20.9) v1@27.6,-21
  Bottom Layer w0.6: v1(55.2,-24.8) v1@55.3,-24.9
IFC: D2.33 U3.3 | length 19.8
  Top Layer w0.254: v2@33.625,-25.525 33.7,-25.45 v2(33.7,-25.4) 34.825,-25.4 U3.3 35.91,-25.525 36.037,-25.652 36.037,-27.14 36.03,-27.147 36.03,-34.772 36.458,-35.2 36.458,-36.329 36.986,-36.857 36.986,-39.586 38.15,-40.75 D2.33
NDAC: D2.31 U3.4 | length 16.7
  Top Layer w0.254: U3.4 36.075,-24.875 36.451,-25.251 36.451,-27.311 36.444,-27.318 36.444,-34.6 36.872,-35.028 36.872,-36.157 37.4,-36.685 37.4,-37.656 37.954,-38.21 D2.31
NetD2_14: D2.14 R10.2 | length 8.1
  Top Layer w0.254: D2.14 59.41,-30.49 61.1,-28.8 R10.2
NetD2_25: D2.25 DS6.1 | length 11.1
  Top Layer w0.254: D2.25 39.39,-29.51 v2(39.4,-29.5) ; v2(40.6,-27.4) 47.415,-27.4 DS6.1
  Bottom Layer w0.254: v2(39.4,-29.5) 39.4,-28.6 v2(40.6,-27.4)
NetD3_2: D3.2 J2.1 | length 12.6
  Top Layer w0.254: J2.1 11.864,-39.364 11.4,-38.9 11.4,-36.7 11.833,-36.267 15.6,-36.267 15.6,-36.39 17.91,-36.39 18.799,-35.501 D3.2@19.537,-35.501
NetD3_3: D3.3 J2.2 | length 7.2
  Top Layer w0.254: J2.2 13.246,-37.66 15.6,-37.66 17.74,-37.66 18.375,-37.025 D3.3@19.537,-37.025
NetD3_4: D3.4 J2.3 | length 10
  Top Layer w0.254: v2(14.1,-38.9) 14.13,-38.93 15.6,-38.93 18,-38.93 18.381,-38.549 D3.4@19.537,-38.549
  Bottom Layer w0.254: J2.3 14.1,-36.354 v2(14.1,-38.9)
NetD3_5: D3.5 J2.4 | length 17
  Top Layer w0.254: J2.4 10.986,-34.688 10.986,-39.886 11.9,-40.8 13.87,-40.8 14.47,-40.2 15.6,-40.2 15.727,-40.073 D3.5@19.537,-40.073
NetD3_6: D3.6 J2.13 | length 12
  Top Layer w0.254: J2.13 10.606,-41.47 15.6,-41.47 15.727,-41.597 D3.6@19.537,-41.597
NetD3_7: D3.7 J2.14 | length 16.8
  Top Layer w0.254: J2.14 7.5,-38.205 7.5,-40.5 9.74,-42.74 15.6,-42.74 18,-42.74 18.381,-43.121 D3.7@19.537,-43.121
NetD3_8: D3.8 J2.15 | length 21.2
  Top Layer w0.254: J2.15 6.6,-36.946 6.6,-41 9.61,-44.01 15.6,-44.01 17.91,-44.01 18.545,-44.645 D3.8@19.537,-44.645
NetD3_9: D3.9 J2.16 | length 25.3
  Top Layer w0.254: J2.16 5.8,-35.587 5.8,-41.4 9.68,-45.28 17.499,-45.28 18.388,-46.169 D3.9@19.537,-46.169
NetD3_12: D3.12 U2.12 | length 12.7
  Top Layer w0.254: D3.12@21.315,-46.169 22.111,-46.169 23.08,-45.2 v2(23.3,-45.2) 24.82,-45.2 D3.12@24.9,-45.28 ; v2(26.8,-41.1) 26.825,-41.075 27.137,-41.075 27.2,-41.138 28.887,-41.138 U2.12
  Bottom Layer w0.254: v2(23.3,-45.2) 23.3,-43 25.2,-41.1 v2(26.8,-41.1)
NetD3_13: D3.13 U2.13 | length 9.7
  Top Layer w0.254: D3.13@21.315,-44.645 22.544,-44.645 23.179,-44.01 24.9,-44.01 24.99,-44.1 v2(26.5,-44.1) ; v2(27.6,-41.725) U2.13
  Bottom Layer w0.254: v2(26.5,-44.1) 26.5,-42.825 v2(27.6,-41.725)
NetD3_14: D3.14 U2.14 | length 7.9
  Top Layer w0.254: D3.14@21.315,-43.121 24.519,-43.121 25.265,-42.375 U2.14
NetD3_15: D3.15 U2.15 | length 14.3
  Top Layer w0.254: D3.15@21.315,-41.597 24.773,-41.597 24.9,-41.47 25.63,-41.47 26.213,-40.887 26.213,-40.574 27.274,-39.513 29.638,-39.513 30.218,-40.093 30.218,-42.882 30.075,-43.025 U2.15
NetD3_16: D3.16 U2.16 | length 15.5
  Top Layer w0.254: D3.16@21.315,-40.073 24.773,-40.073 24.9,-40.2 25.8,-40.2 26.656,-39.344 26.857,-39.344 27.102,-39.099 29.999,-39.099 30.632,-39.732 30.632,-43.368 30.325,-43.675 U2.16
NetD3_17: D3.17 U2.17 | length 17
  Top Layer w0.254: D3.17@21.315,-38.549 24.519,-38.549 24.9,-38.93 26.686,-38.93 26.931,-38.685 30.445,-38.685 31.046,-39.286 31.046,-43.754 30.475,-44.325 U2.17
NetD3_18: D3.18 U2.18 | length 19.7
  Top Layer w0.254: D3.18@21.315,-37.025 22.207,-37.025 22.842,-37.66 30.96,-37.66 31.46,-38.16 31.46,-44.64 31.125,-44.975 U2.18
NetD3_19: D3.19 U2.20 | length 22.7
  Top Layer w0.254: D3.19@21.315,-35.501 22.581,-35.501 23.47,-36.39 24.9,-36.39 30.79,-36.39 31.874,-37.474 31.874,-45.576 31.175,-46.275 U2.20
NetD4_2: D4.2 J2.5 | length 24
  Top Layer w0.254: J2.5 10.286,-28.22 10.286,-18.214 11.78,-16.72 15.8,-16.72 17.58,-16.72 18.469,-15.831 D4.2@19.737,-15.831
NetD4_3: D4.3 J2.6 | length 20
  Top Layer w0.254: 12.402,-18.701 13.699,-18.701 14.41,-17.99 15.8,-17.99 17.465,-17.99 18.1,-17.355 D4.3@19.737,-17.355 ; 12.401,-18.7 11.3,-18.7 10.7,-19.3 10.7,-26.474 J2.6
NetD4_4: D4.4 J2.7 | length 16.5
  Top Layer w0.254: v2(14.2,-19.26) 15.8,-19.26 17.519,-19.26 17.9,-18.879 D4.4@19.737,-18.879
  Bottom Layer w0.254: J2.7 11.1,-24.714 11.1,-19.8 11.913,-18.987 13.178,-18.987 13.451,-19.26 v2(14.2,-19.26)
NetD4_5: D4.5 J2.8 | length 9.8
  Top Layer w0.254: v2(14.37,-20.53) 15.8,-20.53 19.61,-20.53 D4.5@19.737,-20.403
  Bottom Layer w0.254: J2.8 14.1,-22.934 14.1,-20.8 v2(14.37,-20.53)
NetD4_6: D4.6 J2.9 | length 7.1
  Top Layer w0.254: J2.9 13.074,-21.8 15.8,-21.8 19.61,-21.8 D4.6@19.737,-21.927
NetD4_7: D4.7 J2.10 | length 12.7
  Top Layer w0.254: J2.10 11.776,-19.924 11.114,-20.586 11.114,-22.214 11.97,-23.07 15.8,-23.07 17.619,-23.07 18,-23.451 D4.7@19.737,-23.451
NetD4_8: D4.8 J2.11 | length 15.5
  Top Layer w0.254: v2(14.2,-24.34) 15.8,-24.34 17.265,-24.34 17.9,-24.975 D4.8@19.737,-24.975
  Bottom Layer w0.254: J2.11 14.664,-17.764 15.9,-19 15.9,-22.74 14.3,-24.34 v2(14.2,-24.34)
NetD4_9: D4.9 J2.17 | length 16.7
  Top Layer w0.254: J2.17 10.528,-30.728 11.55,-31.75 13.32,-31.75 13.87,-31.2 13.87,-26.6 14.86,-25.61 D4.9@15.2,-25.61 ; D4.9@15.8,-25.61 17.31,-25.61 18.199,-26.499 D4.9@19.737,-26.499
NetD4_12: D4.12 U3.12 | length 17
  Top Layer w0.254: D4.12@21.515,-26.499 21.774,-26.24 22.86,-26.24 v2(23.5,-25.6) 25.09,-25.6 D4.12@25.1,-25.61 ; U3.12 v2(30.925,-21.625)
  Bottom Layer w0.254: v2(23.5,-25.6) 30.1,-25.6 30.925,-24.775 v2(30.925,-21.625)
NetD4_13: D4.13 U3.13 U5.2 | length 22.3
  Top Layer w0.3: U5.2 21.684,-30.1 21.784,-30 v2(21.695,-30) ; D4.13@21.515,-24.975 22.725,-24.975 23.36,-24.34 v2(23.4,-24.34) D4.13@25.1,-24.34 ; U3.13 v2(30.3,-22.275)
  Bottom Layer w0.3: v2(21.695,-30) 21.695,-27.014 21.984,-26.724 21.5,-26.24 v2(23.4,-24.34) 29.86,-24.34 30.3,-23.9 v2(30.3,-22.275)
NetD4_14: D4.14 U3.14 U5.1 | length 17.3
  Top Layer w0.3: v2(19.61,-27.8) 19.61,-28.595 19.59,-28.615 19.59,-30.424 19.801,-30.635 20.425,-30.635 U5.1 ; D4.14@21.515,-23.451 21.896,-23.07 v2(22.73,-23.07) 25.1,-23.07 25.1,-23.04 28.735,-23.04 U3.14
  Bottom Layer w0.3: v2(19.61,-27.8) 19.61,-26.19 v2(22.73,-23.07)
NetD4_15: D4.15 U3.15 | length 9.9
  Top Layer w0.254: D4.15@21.515,-21.927 21.642,-21.8 v2(23.4,-21.8) D4.15@25.1,-21.8 ; v2(27,-23.7) 27.125,-23.575 U3.15
  Bottom Layer w0.254: v2(23.4,-21.8) 25.3,-23.7 v2(27,-23.7)
NetD4_16: D4.16 U3.16 | length 16.5
  Top Layer w0.254: D4.16@21.515,-20.403 21.642,-20.53 25.1,-20.53 26.757,-20.53 27.187,-20.1 30.85,-20.1 31.772,-21.022 31.772,-23.428 30.975,-24.225 U3.16
NetD4_17: D4.17 U3.17 | length 18.3
  Top Layer w0.254: D4.17@21.515,-18.879 23.179,-18.879 23.56,-19.26 25.1,-19.26 30.7,-19.26 32.186,-20.746 32.186,-23.764 31.075,-24.875 U3.17
NetD4_18: D4.18 U3.18 | length 20.3
  Top Layer w0.254: D4.18@21.515,-17.355 23.2,-17.355 23.835,-17.99 25.1,-17.99 30.2,-17.99 30.2,-18 32.6,-20.4 32.6,-23.95 31.025,-25.525 U3.18
NetD4_19: D4.19 U3.20 | length 22.8
  Top Layer w0.254: D4.19@21.515,-15.831 22.91,-15.831 23.799,-16.72 25.1,-16.72 29.82,-16.72 v2(33.3,-20.2) ; U3.20 28.875,-26.8 v2(30.2,-26.8)
  Bottom Layer w0.254: v2(30.2,-26.8) 33.3,-23.7 v2(33.3,-20.2)
NetDS1_1: DS1.1 R4.1 | length 4.2
  Top Layer w0.6: R4.1 DS1.1
NetDS1_2: DS1.2 U1.14 | length 8.7
  Top Layer w0.254: U1.14 45.597,-3.297 v2(45.9,-3.6) ; v2(46.4,-6.3) 47.3,-7.2 DS1.2
  Bottom Layer w0.254: v2(45.9,-3.6) 45.9,-5.8 v2(46.4,-6.3)
NetDS2_1: DS2.1 R5.1 | length 3.7
  Top Layer w0.6: R5.1 DS2.1
NetDS2_2: DS2.2 U1.7 | length 6.7
  Top Layer w0.254: DS2.2 34.875,-7.675 36.737,-5.813 39.15,-5.813 U1.7
NetDS3_1: DS3.1 R6.1 | length 2
  Top Layer w0.254: DS3.1 60.75,-5.322 R6.1
NetDS4_2: DS4.2 R13.2 | length 2.4
  Top Layer w0.254: DS4.2 52.871,-26.15 R13.2
NetDS5_2: DS5.2 R12.2 | length 2.6
  Top Layer w0.254: R12.2 58.378,-25.428 DS5.2
NetDS6_2: DS6.2 R14.2 | length 2.8
  Top Layer w0.254: R14.2 47.125,-25.475 DS6.2
NetJ1_1: J1.1 L1.1 | length 2.3
  Top Layer w1: J1.1 43.251,-15.501 L1.1
NetJ1_2: J1.2 R7.1 | length 5
  Top Layer w0.254: J1.2 40.5,-15 41.788,-13.712 41.788,-10.8 R7.1
NetJ1_3: J1.3 R8.1 | length 2.7
  Top Layer w0.254: R8.1 40.25,-11.95 J1.3
NetL1_2: L1.2 R1.1 | length 3.1
  Top Layer w1: R1.1 46.305,-17.495 L1.2
NetL2_2: L2.2 U4.3 | length 2.6
  Top Layer w1: U4.3 57.7,-10 L2.2
NetR7_2: R7.2 U1.9 | length 3.6
  Top Layer w0.254: R7.2 41.85,-7.838 43.216,-6.472 U1.9
NetR8_2: R8.2 U1.8 | length 2.3
  Top Layer w0.254: R8.2 39.1,-6.547 U1.8
NRFD: D2.30 U3.5 | length 16.1
  Top Layer w0.254: U3.5 36.425,-24.225 36.865,-24.665 36.865,-27.483 36.858,-27.49 36.858,-34.429 37.286,-34.857 37.286,-35.986 38.24,-36.94 D2.30
PE: D3.11 U5.4 | length 33.3
  Top Layer w0.254: v2(14,-34.9) 14,-33.425 15.838,-31.587 15.843,-31.587 17.975,-29.455 U5.4 ; v2(14.1,-46.2) 14.1,-47.83 14.67,-48.4 24.286,-48.4 24.9,-47.786 D3.11
  Bottom Layer w0.254: v2(14,-34.9) 15,-35.9 15,-45.3 v2(14.1,-46.2)
REN: D2.37 U3.1 | length 29.1
  Top Layer w0.254: v2(33.7,-26.9) 34.875,-26.9 U3.1 ; v2(39.2,-27) 39.2,-27.285 38.935,-27.55 41.104,-29.719 41.104,-30.19 42.187,-31.273 42.187,-44.113 40.47,-45.83 D2.37
  Bottom Layer w0.254: v2(33.7,-26.9) 33.6,-27 v2(39.2,-27)
RX: D2.34 R2.1 U1.1 | length 54.2
  Top Layer w0.254: R2.1 32.05,-1.9 37.326,-1.9 v2(37.613,-2.187) 37.772,-2.027 U1.1 ; v2(35.46,-19.856) 35.46,-19.86 35.5,-19.9 35.5,-19.288 37.142,-17.646 37.142,-7.448 37,-7.306 v2(37,-6.4) ; D2.34 40.29,-42.02 40.855,-41.455 v2(40.855,-32.929)
  Bottom Layer w0.254: v2(35.46,-19.856) 35.46,-23.215 38.358,-26.113 40.343,-26.113 41.187,-26.957 41.187,-32.013 40.855,-32.345 v2(40.855,-32.929) ; v2(37,-6.4) 37,-2.8 v2(37.613,-2.187)
SRQ: D2.26 U3.9 | length 14.8
  Top Layer w0.254: U3.9 36.476,-21.625 38.521,-23.67 38.521,-27.721 40.69,-29.89 40.69,-31.86 D2.26
TE: D2.16 D3.1 D4.1 DS5.1 | length 74.7
  Top Layer w0.254: v2(14.13,-15.63) 14.31,-15.45 D4.1 ; v2(15.6,-32.7) D3.1 16.52,-34.2 20.8,-34.2 23.634,-31.366 30.866,-31.366 v2(35.6,-36.1) ; v2(15.6,-31) v2(15.6,-27.9) ; v2(43.313,-36.1) 43.915,-36.1 48.669,-31.346 51.354,-31.346 52.33,-30.37 D2.16 52.33,-28.103 52.712,-27.721 58.479,-27.721 59,-27.2 DS5.1
  Bottom Layer w0.254: v2(14.13,-15.63) 16.314,-17.814 16.314,-22.911 15.6,-23.625 v2(15.6,-27.9) ; v2(15.6,-32.7) v2(15.6,-31) ; v2(35.6,-36.1) v2(43.313,-36.1)
TX: D2.35 R3.1 U1.4 | length 63.5
  Top Layer w0.254: R3.1 29.764,-1.486 40.397,-1.486 40.737,-1.826 40.737,-1.837 41.1,-2.2 41.1,-3.5 40.668,-3.932 U1.4 37.954,-3.932 v2@37.742,-4.144 ; v2(36.22,-20.01) 36.22,-19.154 37.587,-17.787 v2(37.587,-7.063) ; v2(37.6,-4.1) 37.611,-4.089 v2@37.686,-4.089 ; D2.35 41.15,-43.29 41.599,-42.841 41.599,-32.6 v2(41.6,-32.599)
  Bottom Layer w0.254: v2(36.22,-20.01) 36.324,-20.114 36.324,-23.494 38.529,-25.699 40.515,-25.699 41.601,-26.785 v2(41.6,-32.599) v2(41.6,-32.599) ; v2(37.587,-7.063) 37.613,-7.037 37.6,-7.024 v2(37.6,-4.1)
pads on no net: D2.4 D2.5 D2.6 D2.7 D2.17 D2.18 D2.19 D2.20 D2.21 D2.22 D2.32 U1.2 U1.6 U1.10 U1.15 U1.16

## Polygon pours and split planes (outlines as drawn)
3.3V on Top Layer "Top Layer-3.3V" (solid, pour order 4): 64,-55 31.75,-55 31.75,0 64,0
5V on Top Layer "Top Layer-5V" (solid, remove dead copper, pour order 0): 31.75,-23.5 31.75,0 0,0 0,-55 31.75,-55 31.998,-55
GND on Bottom Layer "Bottom Layer-GND" (solid, pour order 8): 64,0 0,0 0,-55 64,-55

## Keep-outs
Keep-Out Layer:
  rectangle: 36.75,-55 64,-47.5

## Silkscreen, mask and mechanical layers (free items; w line width, h text height)
Top Overlay:
  text "GND" at 17.082,-3.8 h2
  text "5V" at 21.95,-3.8 h2
Bottom Overlay:
  text "WGPIB 07.07.2018 rev.0" at 68.75,-50 h2
  text "CERN OHL v1.2" at 72,-52 h2
  text "github: sixtemesseven/WGPIB" at 67.5,-54.75 h2
Mechanical 1:
  lines w0.254: 0,-55 0,0 0,0.1 64,0.1 64,0 64,-55 0,-55

## Text inside footprints (layer, text, board x,y; h text height)
D2: Top Overlay "1" at 58.15,-46.75 h1.2 r180; Top Overlay "ANTENNA KEEP OUT" at 53.5,-48.7 h0.89 r180